# Altium PCB bridge.PcbDoc
Units mil, origin at the board's own origin, x right, y up, seen from the top; angles counter-clockwise.
Board outline 1693.9 x 1970 mil, 4 copper layers (Top Layer, Internal Plane 1, Internal Plane 2, Bottom Layer), stack 29.834 mil thick; 35 components, 64 nets, 87 pads, 388 vias.
Unrouted connection lines stored in the file: 2.
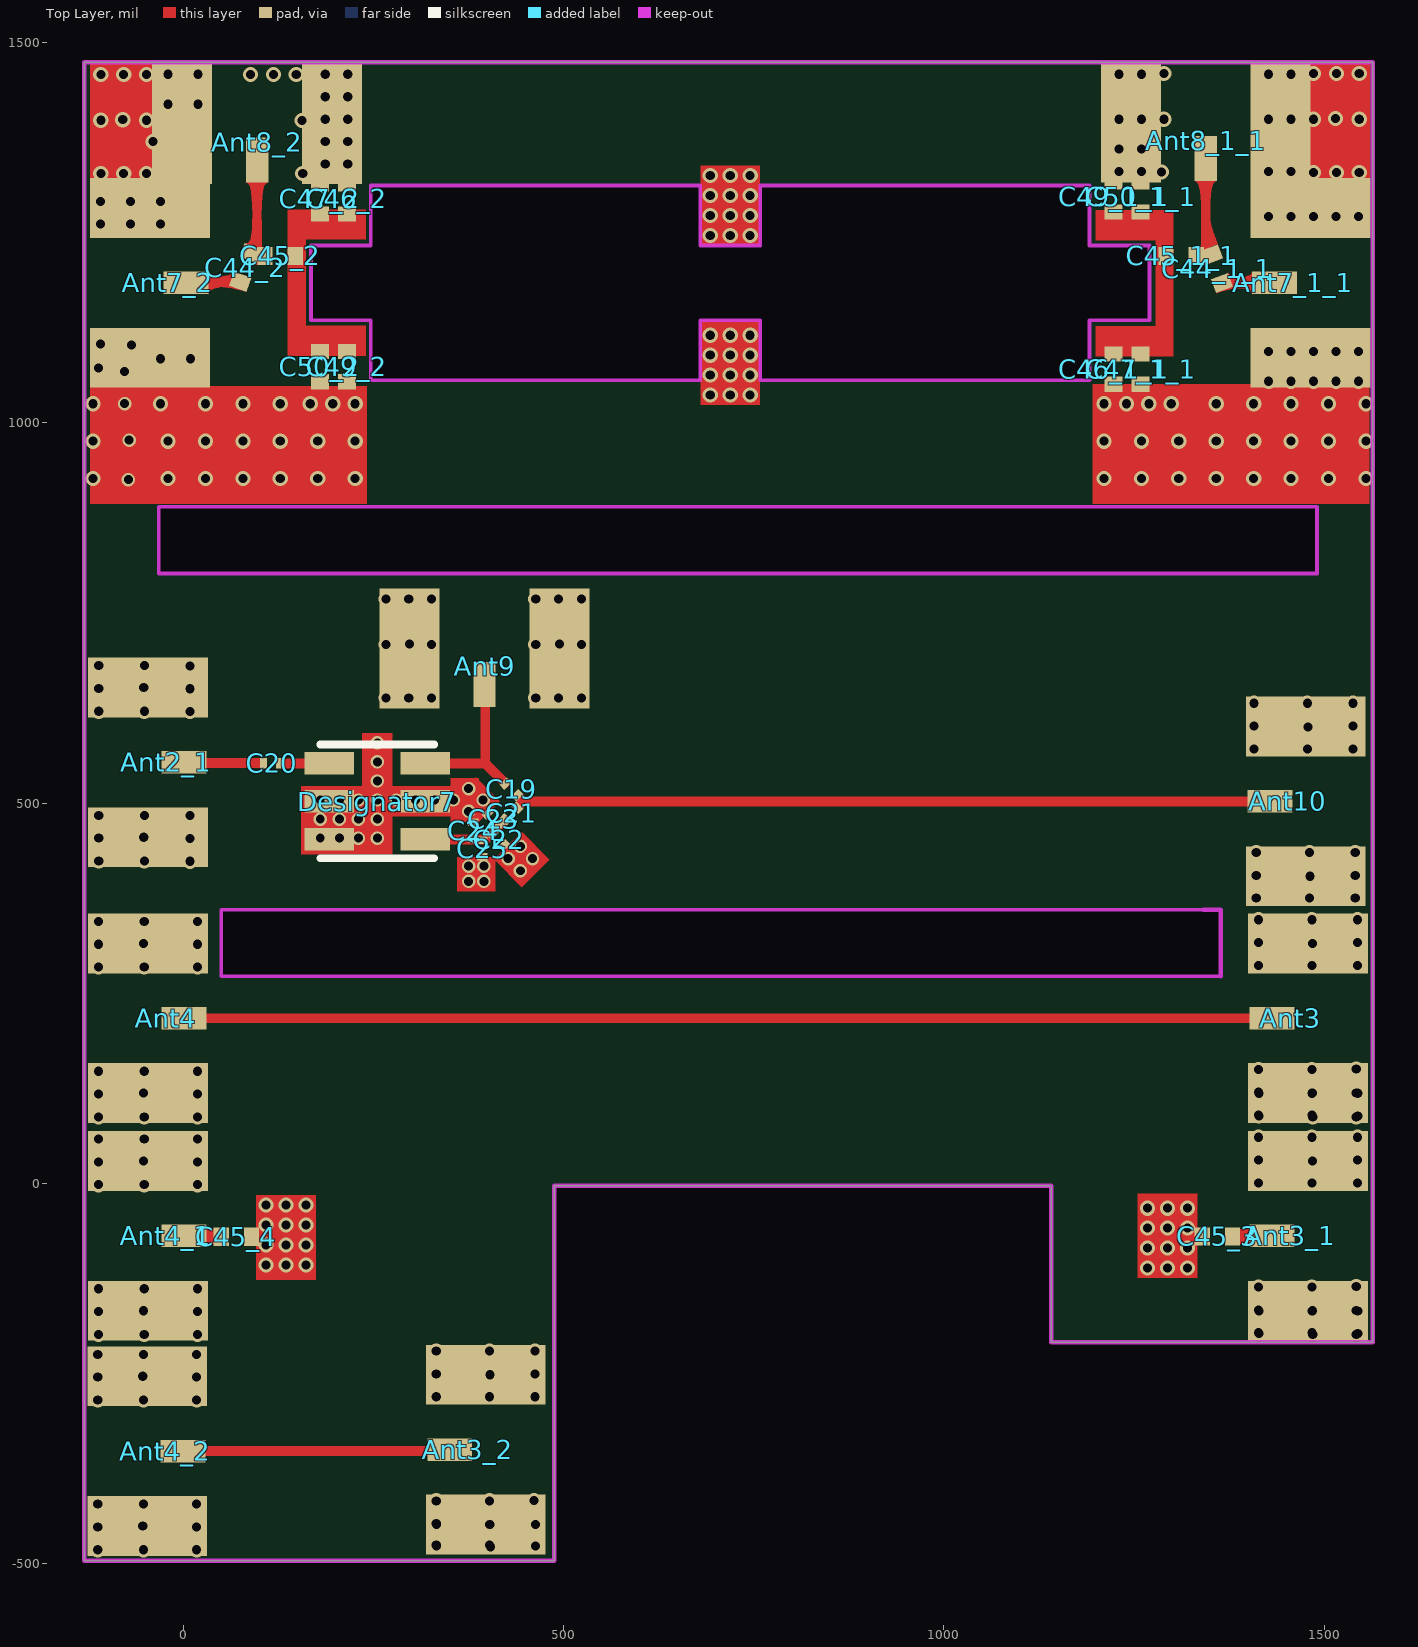
[diagram p0: Top Layer view]
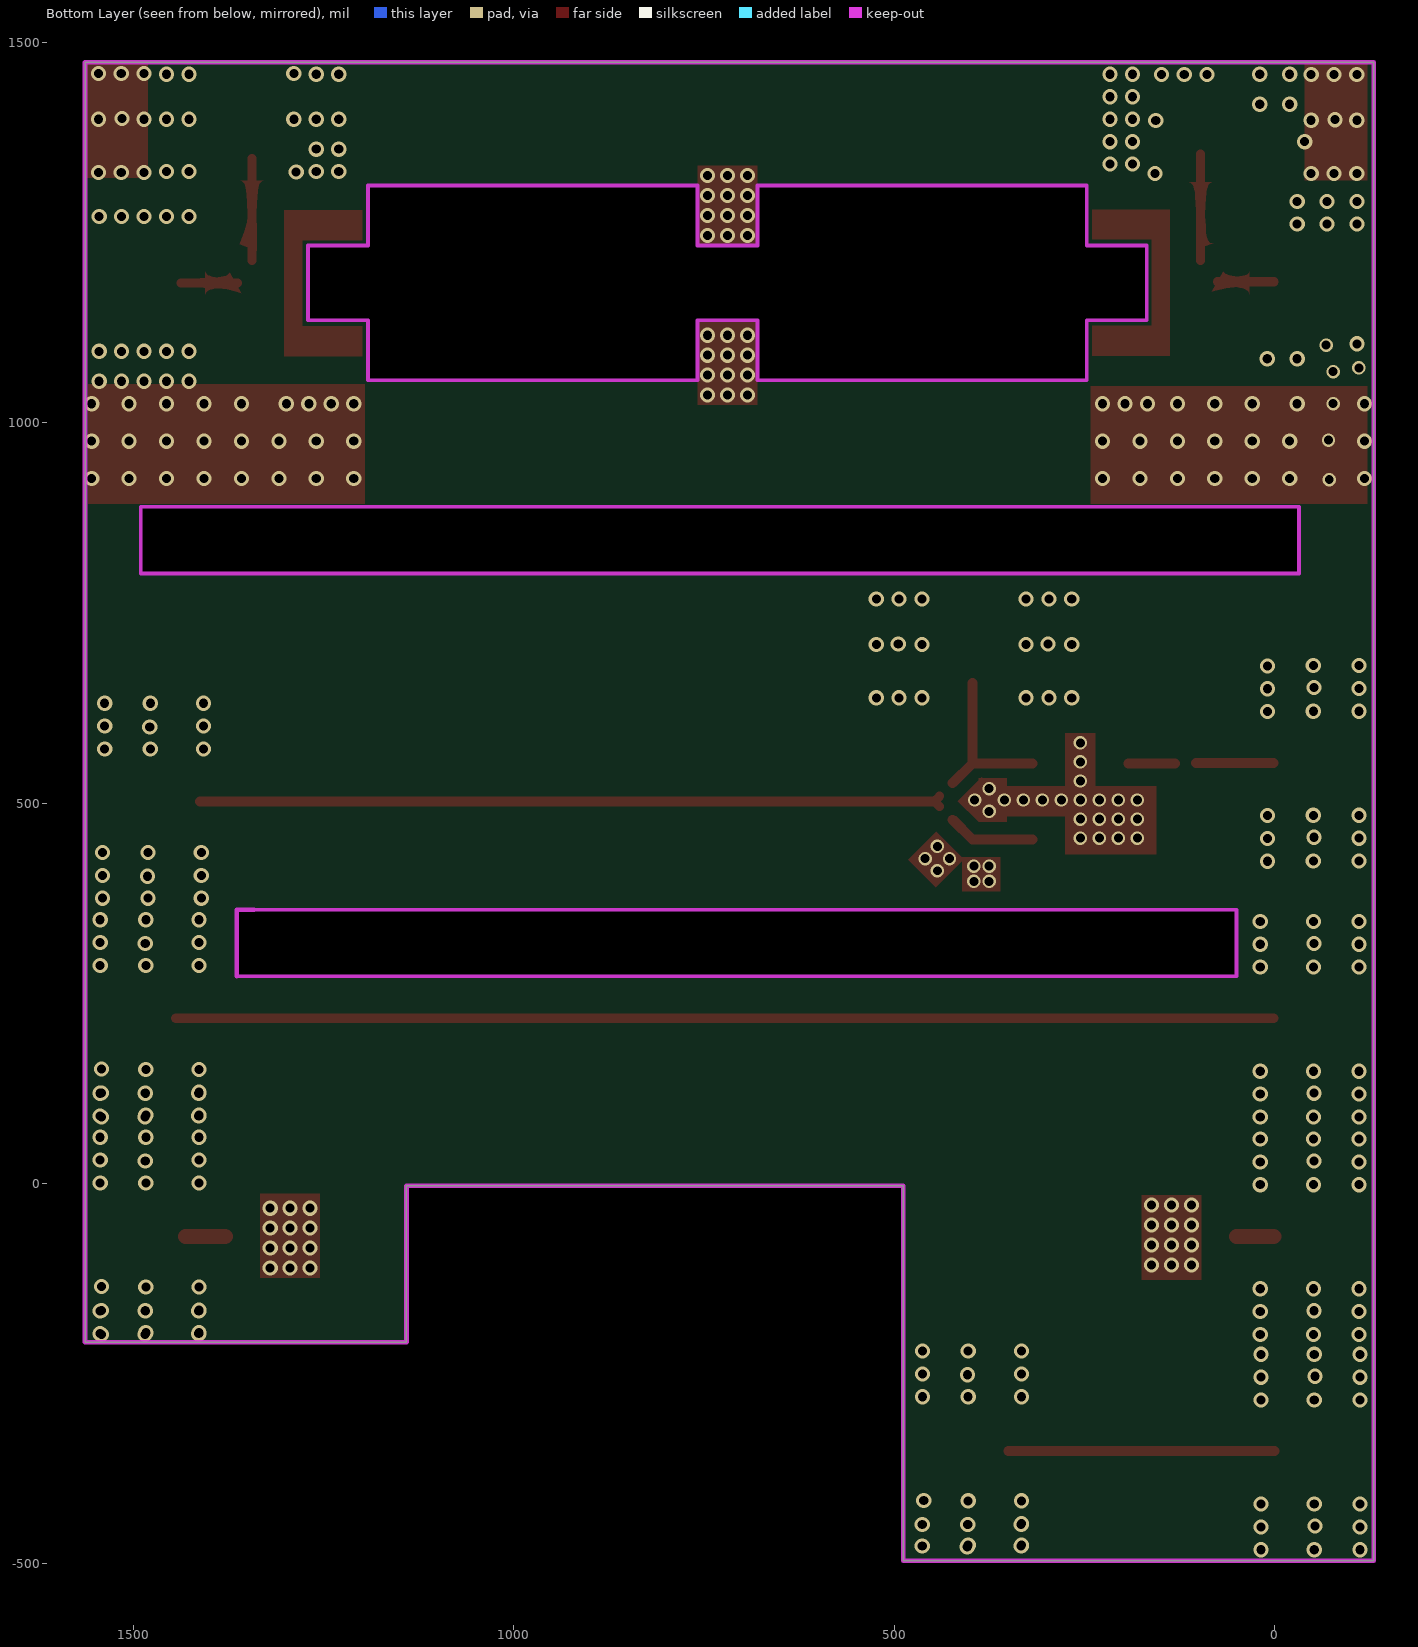
[diagram p1: Bottom Layer view, seen from below]
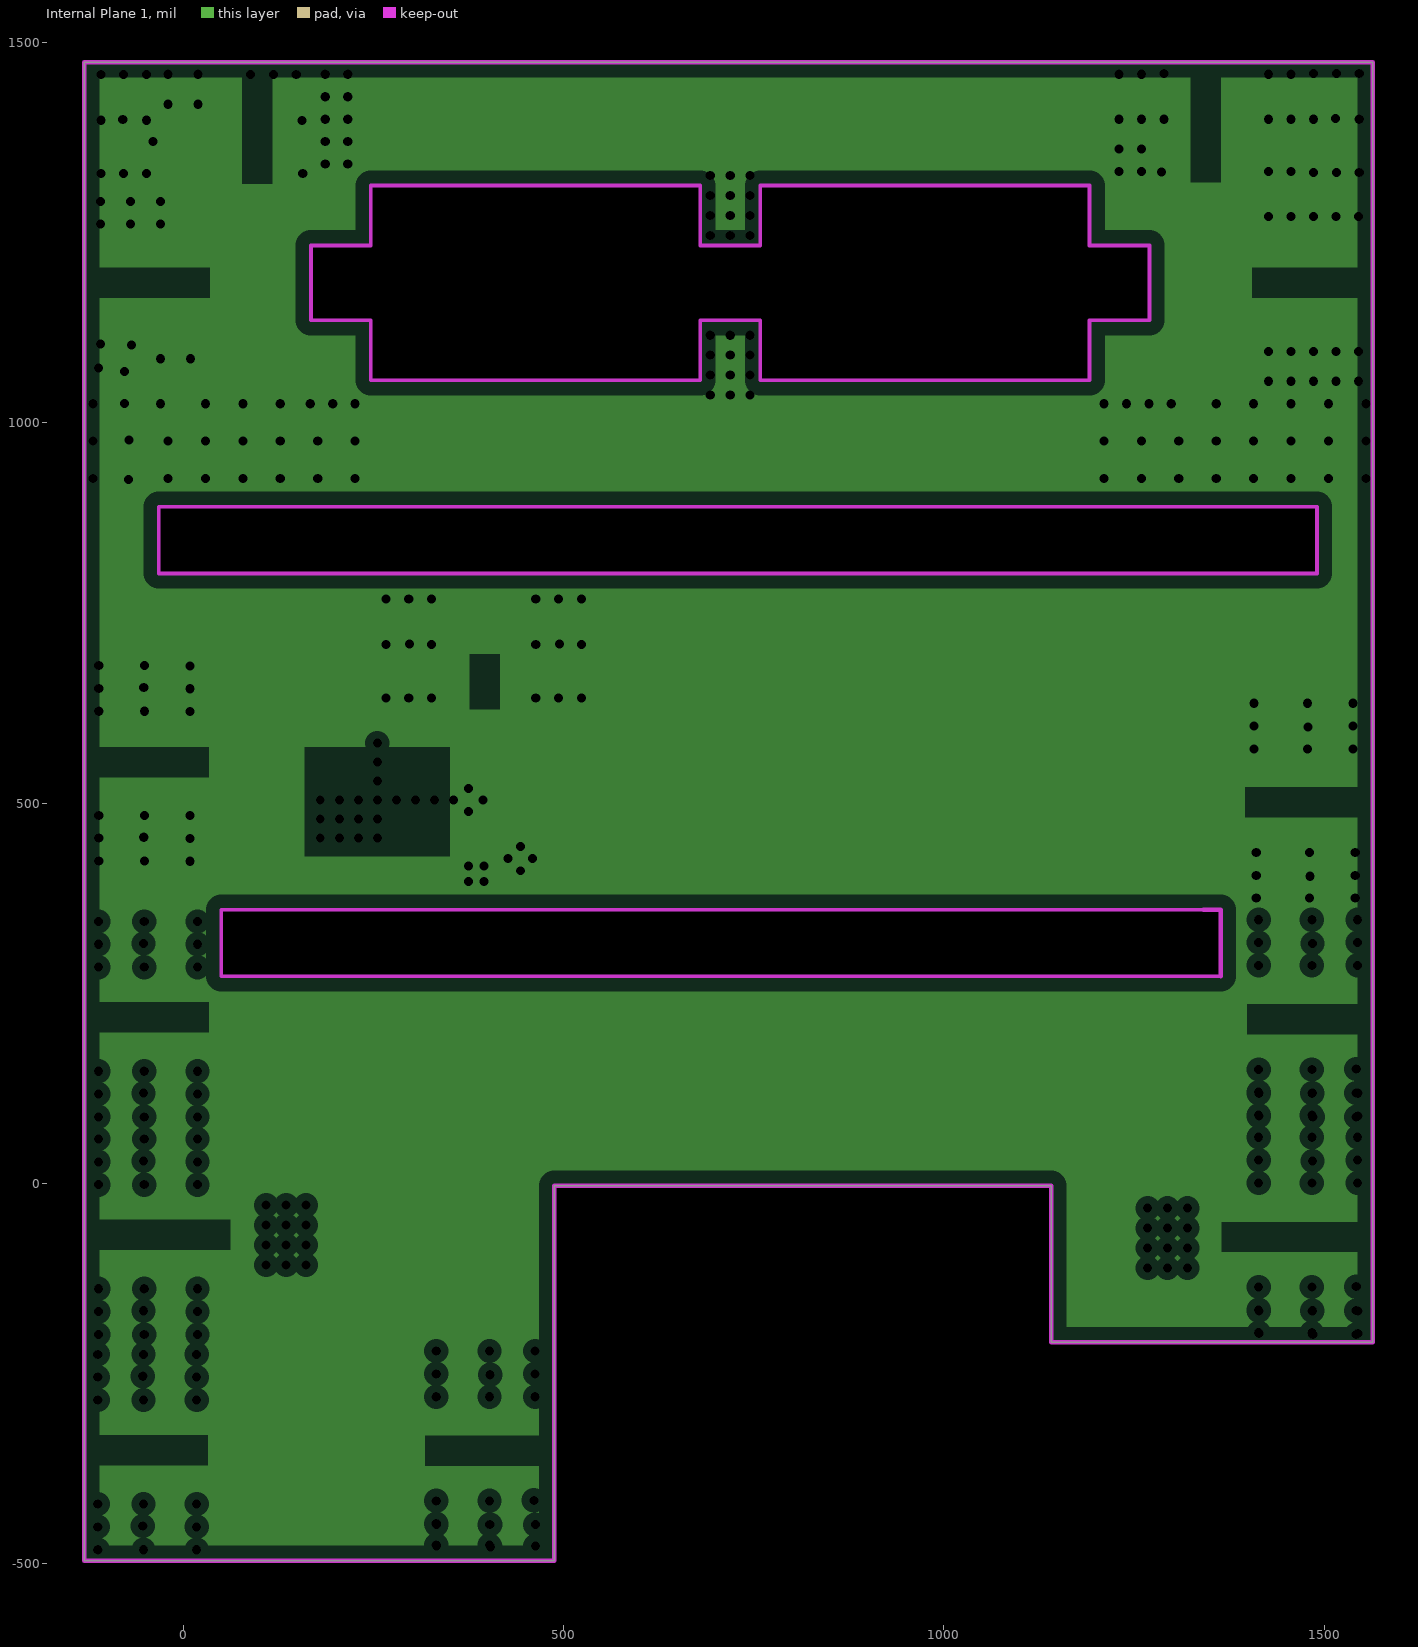
[diagram p2: Internal Plane 1, clearances drawn from the general rule]
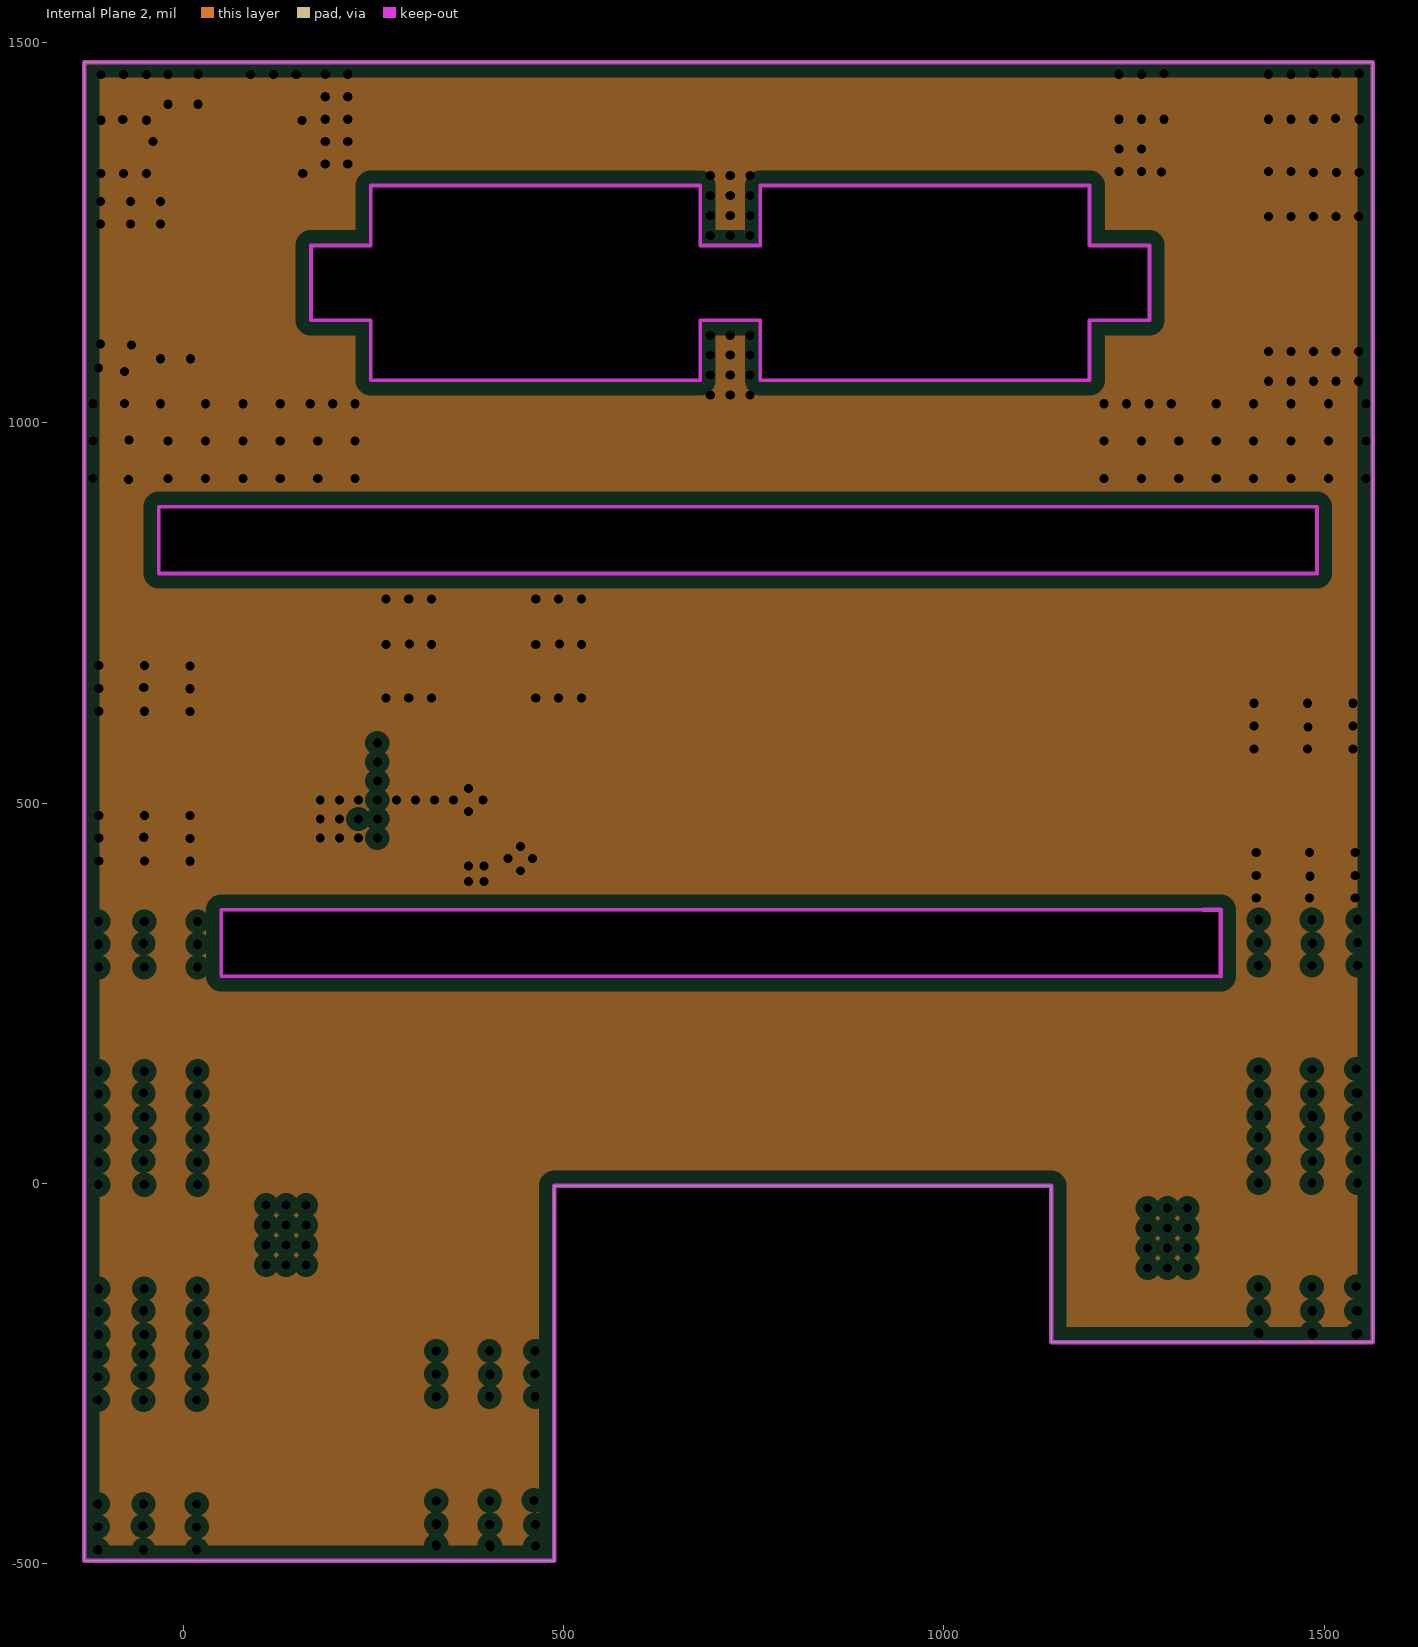
[diagram p3: Internal Plane 2, clearances drawn from the general rule]

## Layer stack, top to bottom
Top Solder: solder mask 0.4, Solder Resist, Dk 3.8
Top Layer: signal copper 1.4
Dielectric 1: prepreg 7.1, Dk 4.6
Internal Plane 1: plane copper 1.417, net GND
Dielectric 3: core 10, Dk 4.6
Internal Plane 2: plane copper 1.417, net GND
Dielectric 4: prepreg 7.1, Dk 4.6
Bottom Layer: signal copper 1.4
Bottom Solder: solder mask 0.4, Solder Resist, Dk 3.8

## Board outline
-130.28,-496 -130.28,1474 1563.62,1474 1563.62,-209 1141,-209 1141,-3 488,-3 488,-496
cut-out: 50,272.2 1364,272.2 1364,359.8 50,359.8
cut-out: -32.2,801.85 1490.43,801.85 1490.43,889.45 -32.2,889.45
cut-out: 1270.32,1134.53 1191.57,1134.53 1191.57,1055.79 758.5,1055.79 758.5,1134.53 679.76,1134.53 679.76,1055.79 246.69,1055.79 246.69,1134.53 167.95,1134.53 167.95,1232.95 246.69,1232.95 246.69,1311.69 679.76,1311.69 679.76,1232.95 758.5,1232.95 758.5,1311.69 1191.57,1311.69 1191.57,1232.95 1270.32,1232.95

## Design rules (kind name [scope] priority, off if disabled: settings)
Clearance [All] p1: gap=6 ignorepadtopadclearanceinfootprint=FALSE except(0: Arc-Hole Track-Hole SMDPad-Hole THPad-Hole Via-Hole Fill-Hole Poly-Hole Region-Hole Text-Hole)
DiffPairsRouting [All] p1: maxlimit=10 minlimit=10 mostfreqgap=10 toplayer_minwidth=5.98 toplayer_maxwidth=15 toplayer_prefwidth=15 bottomlayer_minwidth=5.98 bottomlayer_maxwidth=15 bottomlayer_prefwidth=15 maxuncoupledlength=500
MinimumSolderMaskSliver [All] p1 off: minsoldermaskwidth=10
PlaneClearance [All] p1: clearance=10
PlaneConnect [All] p1: planeconnectstyle=Direct reliefexpansion=20 reliefentries=4 reliefconductorwidth=10 reliefairgap=10
PolygonConnect [All] p1: connectstyle=Direct reliefconductorwidth=10 reliefentries=4 polygonreliefangle="90 Angle" airgapwidth=10
RoomDefinition mixer [InComponentClass('mixer')] p1 off: confinementstyle=ConfineIn formatcopy=TRUE lockcomponents=FALSE outline 1838.72,1218.73 7307.72,1218.73 7307.72,1613.73 1838.72,1613.73
RoomDefinition power [InComponentClass('power')] p2 off: confinementstyle=ConfineIn formatcopy=TRUE lockcomponents=FALSE outline 1834.72,-428.27 4179.72,-428.27 4179.72,-188.27 1834.72,-188.27
RoutingVias [All] p1: holewidth=12 width=20 viastyle="Through Hole" minholewidth=11.81 minwidth=19.68 maxholewidth=28 maxwidth=50
SilkToBoardRegionClearance [All] p1 off:
SilkToSilkClearance [All] p1 off: silktosilkclearance=10
SilkToSolderMaskClearance [IsPad] p1 off: minsilkscreentomaskgap=10 clearancetoexposedcopper=TRUE
SolderMaskExpansion [All] p1: expansion=4
Width [All] p1: maxlimit=60 minlimit=6 preferedwidth=6
23 further rules are at their usual default settings.

## Classes and differential pairs
component class mixer: R28
differential pair IF2: +IF2_P -IF2_N
differential pair IF1: +IF1_P -IF1_N

## Components (designator, comment, footprint, x,y, rotation, side; value= is the part's Value field where it differs from the comment)
Ant2_1 "Antenna" SMA-2 -46.06,651.79 r270 top (schematic designator Ant2)
Ant3 "Antenna" SMA-2 1478.66,118.58 r90 top (schematic designator Ant2)
Ant3_1 "Antenna" SMA-2 1478.66,-167.42 r90 top (schematic designator Ant2)
Ant3_2 "Antenna" SMA-2 397.66,-448.42 r90 top (schematic designator Ant2)
Ant4 "Antenna" SMA-2 -46.24,315.43 r270 top (schematic designator Ant2)
Ant4_1 "Antenna" SMA-2 -46.24,29.43 r270 top (schematic designator Ant2)
Ant4_2 "Antenna" SMA-2 -47.24,-253.57 r270 top (schematic designator Ant2)
Ant7_1_1 "Antenna" SMA-2 1481.93,1085.32 r90 top (schematic designator Ant2)
Ant7_2 "Antenna" SMA-2 -43.66,1282.17 r270 top (schematic designator Ant2)
Ant8_1_1 "Antenna" SMA-2 1442.56,1394.37 r180 top (schematic designator Ant2)
Ant8_2 "Antenna" SMA-2 195.51,1392.4 r180 top (schematic designator Ant2)
Ant9 "Antenna" SMA-2 494.55,703.26 r180 top (schematic designator Ant2)
Ant10 "Antenna" SMA-2 1475.67,403.76 r90 top (schematic designator Ant2)
C19 "0.1uF" 0201 431.38,517.93 r135 top
C20 "0.1uF" 0201 116.42,552.38 r180 top (schematic designator C19)
C21 "0.1uF" 0201 431.38,486.43 r45 top (schematic designator C19)
C22 "0.1uF" 0201 414.65,451.98 r315 top (schematic designator C19)
C23 "0.1uF" 0201 407.76,478.56 r315 top (schematic designator C19)
C24 "0.1uF" 0201 381.18,463.8 r270 top (schematic designator C19)
C25 "0.1uF" 0201 392.99,440.17 r270 top (schematic designator C19)
C44_1_1 "1nF" 0402 1358.9,1202.44 r290 top (schematic designator C43)
C44_2 "1nF" 0402 81.69,1203.74 r70 top (schematic designator C43)
C45_1_1 "1nF" 0402 1311.65,1219.17 r0 top (schematic designator C43)
C45_2 "1nF" 0402 127.6,1219.17 r180 top (schematic designator C43)
C45_3 "1nF" 0402 1359.6,-69.83 r180 top (schematic designator C43)
C45_4 "1nF" 0402 69.68,-70 r0 top (schematic designator C43)
C46_1_1 "1nF" 0402 1223.07,1070.55 r270 top (schematic designator C43)
C46_2 "1nF" 0402 215.2,1293.98 r90 top (schematic designator C43)
C47_1_1 "1nF" 0402 1258.5,1070.55 r270 top (schematic designator C43)
C47_2 "1nF" 0402 179.76,1293.98 r90 top (schematic designator C43)
C49_1_1 "1nF" 0402 1223.07,1296.98 r270 top (schematic designator C43)
C49_2 "1nF" 0402 215.2,1073.5 r90 top (schematic designator C43)
C50_1_1 "1nF" 0402 1258.5,1296.98 r270 top (schematic designator C43)
C50_2 "1nF" 0402 179.76,1073.5 r90 top (schematic designator C43)
Designator7 "Comment" TCM1-63AX+ 255.2,502.18 r270 top

## Footprints (in the part's own frame and the unit in brackets; to place one, negate y for a bottom-side part, rotate by r counter-clockwise, add the part's x,y. Pads: shape width x height; smd on the part's side, far side on the other; paste and mask are expansions set on the pad)
0201 [mm]
  rect 0.25x0.35 smd: 1(-0.275,0) 2(0.275,0)
0402 [mil] "0402-RES"
  rect 20x24 smd: 1(-19.68,0) 2(20,0)
SMA-2 [mm]
  rect 0.75x1.5 smd: 1(2.5,1.2)
  rect 2x4 smd: GND(0,0) GND(5,0)
  Top Layer pour cut-out: 1,2 4,2 4,-2 1,-2
TCM1-63AX+ [mm]
  rect 0.75x1.65 smd: 1(-1.27,1.6) 2(0,1.6) 2(0,-1.6) 2(1.27,-1.6) 3(1.27,1.6) 5(-1.27,-1.6)
  Top Layer region: -0.508,0.254 0.508,0.254 0.508,2.54 -0.508,2.54
  Top Layer region: -2.286,-0.508 1.778,-0.508 1.778,0.508 -2.286,0.508
  Top Layer region: -0.508,-2.54 1.778,-2.54 1.778,-0.254 -0.508,-0.254
  silkscreen extent -1.9,-1.9 1.9,1.9

## Part data
C19 C20 C21 C22 C23 C24 C25: library part CAP0402-CAP, "<b>Capacitor</b> / Standard 0603 ceramic capacitor, and 0.1\" leaded capacitor.", PARTNO=CC0402ZRY5V7BB104
C44_1_1 C44_2 C45_1_1 C45_2 C45_3 C45_4 C46_1_1 C46_2 C47_1_1 C47_2 C49_1_1 C49_2 C50_1_1 C50_2: library part CAP0402-CAP, "<b>Capacitor</b> / Standard 0603 ceramic capacitor, and 0.1\" leaded capacitor."

## Via types
v1: diameter 20, hole 12, Top Layer to Bottom Layer, tented both sides, 352 vias
v2: diameter 17.72, hole 11.81, Top Layer to Bottom Layer, 36 vias

## Nets (pads, with @x,y where several pads share a name; then routed paths per layer and width w, separated by ;. In a path a pad name is that pad's centre, name@x,y a point inside that pad or via, vN(x,y) a via of type N, cw(c..) or ccw(c..) an arc to the next point about the centre after c; other vN are vias at no path point)
5V: 
5V-MIXER: Ant7_1_1.1 C44_1_1.2 | length 74.3
  Top Layer w12: C44_1_1.2@1363.31,1183.74 Ant7_1_1.1@1437.64,1183.74
5VA: 
5VB: 
6V: 
-3.3V: 
DETO: Ant8_1_1.1 C44_1_1.1 C44_2.2 C45_1_1.2 C45_2.2 | length 273.6
  Top Layer w12: C44_2.2@97.09,1213.27 97.09,1353.03 ; C44_1_1.1@1344.13,1213.27 Ant8_1_1.1
GND: Ant2_1.GND Ant7_1_1.GND Ant7_2.GND Ant8_1_1.GND Ant8_2.1 Ant8_2.GND Ant9.GND Ant10.GND C22.2 C23.1 C46_1_1.2 C46_2.2 C47_1_1.2 C47_2.2 C49_1_1.1 C49_2.1 C50_1_1.1 C50_2.1 Designator7.2
  other v1: 1410.67,374.9 1480.67,374.9 1540.67,374.9 1481.5,403.76 1410.67,404.9 1540.67,404.9 -111.06,423.8 -51.06,423.8 9.13,423.44 1410.67,434.9 1480.67,434.9 1540.67,434.9 -111.06,453.8 9.13,453.44 -51.89,454.94 -111.06,483.8 -51.06,483.8 9.13,483.44 1407.76,571.12 1477.76,571.12 1537.76,571.12 1478.58,599.98 1407.76,601.12 1537.76,601.12 -111.06,620.65 -51.06,620.65 9.13,620.29 1407.76,631.12 1477.76,631.12 1537.76,631.12 266.56,638.26 296.56,638.26 326.56,638.26 463.41,638.26 493.41,638.26 523.41,638.26 -111.06,650.65 9.13,650.29 -51.89,651.79 -111.06,680.65 -51.06,680.65 9.13,680.29 266.56,708.26 297.7,709.09 326.56,708.26 463.41,708.26 494.55,709.09 523.41,708.26 266.56,768.26 296.56,768.26 326.56,768.26 463.41,768.26 493.41,768.26 523.41,768.26 -118.39,926.46 -19.96,926.46 29.25,926.46 78.46,926.46 127.68,926.46 176.89,926.46 226.1,926.46 1210.35,926.46 1259.57,926.46 1308.78,926.46 1357.99,926.46 1407.2,926.46 1456.42,926.46 1505.63,926.46 1554.84,926.46 -118.39,975.67 -19.96,975.67 29.25,975.67 78.46,975.67 127.68,975.67 176.89,975.67 226.1,975.67 1210.35,975.67 1259.57,975.67 1308.78,975.67 1357.99,975.67 1407.2,975.67 1456.42,975.67 1505.63,975.67 1554.84,975.67 -118.39,1024.88 -29.8,1024.88 29.25,1024.88 78.46,1024.88 127.68,1024.88 167.05,1024.88 196.57,1024.88 226.1,1024.88 1210.35,1024.88 1239.88,1024.88 1269.41,1024.88 1298.94,1024.88 1357.99,1024.88 1407.2,1024.88 1456.42,1024.88 1505.63,1024.88 1554.84,1024.88 692.87,1036.3 719.09,1036.3 745.32,1036.3 1426.89,1054.41 1456.42,1054.41 1485.94,1054.41 1515.47,1054.41 1545,1054.41 692.87,1062.52 719.09,1062.52 745.32,1062.52 -29.8,1083.94 9.57,1083.94 692.87,1088.74 719.09,1088.74 745.32,1088.74 1426.89,1093.78 1456.42,1093.78 1485.94,1093.78 1515.47,1093.78 1545,1093.78 -108.54,1103.62 692.87,1114.96 719.09,1114.96 745.32,1114.96 692.87,1246.06 719.09,1246.06 745.32,1246.06 -108.54,1261.1 -69.17,1261.1 -29.8,1261.1 1426.89,1270.95 1456.42,1270.95 1485.94,1270.95 1515.47,1270.95 1545,1270.95 692.87,1272.28 719.09,1272.28 745.32,1272.28 -108.54,1290.63 -69.17,1290.63 -29.8,1290.63 692.87,1298.5 719.09,1298.5 745.32,1298.5 692.87,1324.72 719.09,1324.72 745.32,1324.72 -108.23,1327.48 -78.23,1327.48 -48.23,1327.48 157.13,1327.44 1485.94,1328.9 1515.94,1328.9 1545.94,1328.9 1230.04,1330 1259.57,1330 1286.06,1329.41 1426.89,1330 1456.42,1330 186.73,1339.84 216.26,1339.84 1230.04,1359.53 1259.57,1359.53 -39.65,1369.37 186.73,1369.37 216.26,1369.37 -108.23,1397.48 -48.23,1397.48 156.14,1397.32 -79.37,1398.31 186.73,1398.9 216.26,1398.9 1230.04,1398.9 1259.57,1398.9 1289.09,1398.9 1426.89,1398.9 1456.42,1398.9 1485.94,1398.9 1545.94,1398.9 1514.8,1399.72 -19.96,1418.58 19.41,1418.58 186.73,1428.43 216.26,1428.43 -108.23,1457.48 -78.23,1457.48 -48.23,1457.48 -19.96,1457.95 19.41,1457.95 88.62,1457.48 118.62,1457.48 148.62,1457.48 186.73,1457.95 216.26,1457.95 1230.04,1457.95 1259.57,1457.95 1426.89,1457.95 1456.42,1457.95 1289.09,1458.9 1485.94,1458.9 1515.94,1458.9 1545.94,1458.9
  other v2: 375.2,396.95 395.2,396.95 443.2,410.95 375.2,416.95 395.2,416.95 427.2,426.95 459.2,426.95 443.2,442.95 180.2,453.95 205.2,453.95 230.2,453.95 180.2,478.95 205.2,478.95 375.2,488.95 180.2,503.95 205.2,503.95 230.2,503.95 280.2,503.95 305.2,503.95 330.2,503.95 355.2,503.95 394.2,503.95 375.2,518.95 -72,925 -71,977 -77,1025 -77,1067 -111,1072 -68,1102
IF1_N: 
IF1_P: 
IF2_N: 
IF2_P: 
IF3+: 
IF3-: 
NetAnt1_1: 
NetAnt2_1: 
NetC1_1: 
NetC1_2: 
NetC2_1: 
NetC4_1: 
NetC7_2: 
NetC11_2: 
NetC15_2: 
NetC18_2: 
NetC24_2: 
NetC28_1: 
NetC28_2: 
NetC29_1: 
NetC30_1: 
NetC30_2: 
NetC31_1: 
NetC31_2: 
NetC43_2: 
NetC44_1: 
NetC44_2: 
NetC45_2: 
NetC46_1: 
NetC46_2: 
NetC47_2: 
NetC48_2: 
NetC49_1: 
NetC49_2: 
NetC50_1: 
NetC50_2: 
NetC51_2: 
NetC53_2: 
NetC57_1: 
NetC57_2: 
NetC58_1: 
NetC58_2: 
NetC59_1: 
NetC59_2: 
NetC60_1: 
NetC60_2: 
NetC64_2: 
NetC66_2: 
NetR2_1: 
NetR4_1: 
NetR5_1: 
NetR10_1: 
NetR15_1: 
NetR24_1: 
VSET: 
VSYS: 
pads on no net: Ant2_1.1 Ant3.1 Ant3.GND Ant3_1.1 Ant3_1.GND Ant3_2.1 Ant3_2.GND Ant4.1 Ant4.GND Ant4_1.1 Ant4_1.GND Ant4_2.1 Ant4_2.GND Ant7_2.1 Ant9.1 Ant10.1 C19.1 C19.2 C20.1 C20.2 C21.1 C21.2 C22.1 C23.2 C24.1 C24.2 C25.1 C25.2 C44_2.1 C45_1_1.1 C45_2.1 C45_3.1 C45_3.2 C45_4.1 C45_4.2 C46_1_1.1 C46_2.1 C47_1_1.1 C47_2.1 C49_1_1.2 C49_2.2 C50_1_1.2 C50_2.2 Designator7.1 Designator7.3 Designator7.5
copper on no net: | length 3453.7
  Top Layer w12: 0.63,1185.24 74.96,1185.24 ; 440.24,495.29 447.13,502.18 440.24,509.07
  Top Layer w13: 0,-352 350,-352 ; 1,217 1444,217 ; 1.18,552.38 103,552.38 ; 130.71,552.18 192.2,552.18 ; 318.19,452.18 397.13,452.18 423.01,478.07 ; 318.19,552.18 397.13,552.18 ; 397.13,658 397.13,552.18 ; 423.01,526.3 397.13,552.18 ; 447.13,502.18 1412.68,502.18
  Top Layer w20: 1,-70 50,-70 ; 1379.28,-69.83 1431.42,-69.83
  other v1: -112.24,-481.57 -52.24,-481.57 17.76,-481.57 403.84,-477.72 333.02,-476.58 463.02,-476.58 332.66,-475.28 402.66,-475.28 -112.24,-451.57 17.76,-451.57 -53.07,-450.43 333.02,-448.58 403.02,-448.58 403.49,-448.42 463.02,-448.58 332.66,-447.28 -112.24,-421.57 -52.24,-421.57 17.76,-421.57 332.66,-417.28 402.66,-417.28 461.01,-416.73 -112.24,-284.72 -52.24,-284.72 17.76,-284.72 332.66,-280.43 402.66,-280.43 462.66,-280.43 -112.24,-254.72 17.76,-254.72 -53.07,-253.57 403.49,-251.57 332.66,-250.43 462.66,-250.43 -112.24,-224.72 -52.24,-224.72 17.76,-224.72 332.66,-220.43 402.66,-220.43 462.66,-220.43 -111.24,-198.57 -51.24,-198.57 18.76,-198.57 1484.84,-198.72 1542.01,-198.72 1414.02,-197.58 1544.02,-197.58 1413.66,-196.28 1483.66,-196.28 -111.24,-168.57 18.76,-168.57 -52.07,-167.43 1414.02,-167.58 1484.02,-167.58 1484.49,-167.42 1542.01,-167.23 1544.02,-167.58 1413.66,-166.28 -111.24,-138.57 -51.24,-138.57 18.76,-138.57 1413.66,-136.28 1483.66,-136.28 1542.01,-135.73 1267.78,-111.22 1294,-111.22 1320.22,-111.22 109.06,-107.27 135.28,-107.27 161.5,-107.27 1267.78,-85 1294,-85 1320.22,-85 109.06,-81.05 135.28,-81.05 161.5,-81.05 1267.78,-58.78 1294,-58.78 1320.22,-58.78 109.06,-54.83 135.28,-54.83 161.5,-54.83 1267.78,-32.56 1294,-32.56 1320.22,-32.56 109.06,-28.61 135.28,-28.61 161.5,-28.61 -111.24,-1.72 -51.24,-1.72 18.76,-1.72 1413.66,0.57 1483.66,0.57 1543.66,0.57 -111.24,28.28 18.76,28.28 -52.07,29.43 1484.49,29.43 1413.66,30.57 1543.66,30.57 -111.24,58.28 -51.24,58.28 18.76,58.28 1413.66,60.57 1483.66,60.57 1543.66,60.57 -111.24,87.43 -51.24,87.43 18.76,87.43 1484.84,87.28 1542.01,87.28 1414.02,88.42 1544.02,88.42 1413.66,89.72 1483.66,89.72 -111.24,117.43 18.76,117.43 -52.07,118.57 1414.02,118.42 1484.02,118.42 1484.49,118.58 1542.01,118.77 1544.02,118.42 1413.66,119.72 -111.24,147.43 -51.24,147.43 18.76,147.43 1413.66,149.72 1483.66,149.72 1542.01,150.27 -111.24,284.28 -51.24,284.28 18.76,284.28 1413.66,286.57 1483.66,286.57 1543.66,286.57 -111.24,314.28 18.76,314.28 -52.07,315.43 1484.49,315.43 1413.66,316.57 1543.66,316.57 -111.24,344.28 -51.24,344.28 18.76,344.28 1413.66,346.57 1483.66,346.57 1543.66,346.57
  other v2: 255.2,453.95 230.2,478.95 255.2,478.95 255.2,503.95 255.2,528.95 255.2,553.95 255.2,578.95

## Polygon pours and split planes (outlines as drawn)
GND on Internal Plane 1 (split plane): 1543.53,1203.43 1405.31,1203.43 1405.31,1164.06 1543.53,1164.06 1543.53,520.41 1395.98,520.41 1395.98,481.04 1543.53,481.04 1543.53,235.23 1398.98,235.23 1398.98,195.86 1543.53,195.86 1543.53,-50.77 1365,-50.77 1365,-90.14 1543.53,-90.14 1543.53,-188.9 1161.1,-188.9 1161.1,-3 1160.71,0.92 1159.57,4.69 1157.71,8.17 1155.21,11.21 1152.17,13.71 1148.69,15.57 1144.92,16.71 1141,17.1 488,17.1 484.08,16.71 480.31,15.57 476.83,13.71 473.79,11.21 471.29,8.17 469.43,4.69 468.29,0.92 467.9,-3 467.9,-331.77 317.98,-331.77 317.98,-371.14 467.9,-371.14 467.9,-475.9 -110.18,-475.9 -110.18,-370.23 32.44,-370.23 32.44,-330.86 -110.18,-330.86 -110.18,-87.23 62,-87.23 62,-47.86 -110.18,-47.86 -110.18,198.77 33.44,198.77 33.44,238.14 -110.18,238.14 -110.18,534.15 33.62,534.15 33.62,573.52 -110.18,573.52 -110.18,1164.06 34.92,1164.06 34.92,1203.43 -110.18,1203.43 -110.18,1453.9 77.4,1453.9 77.4,1313.82 116.77,1313.82 116.77,1453.9 1324.45,1453.9 1324.45,1315.79 1363.82,1315.79 1363.82,1453.9 1543.53,1453.9
GND on Internal Plane 2 (split plane): 1543.53,-188.9 1161.1,-188.9 1161.1,-3 1160.71,0.92 1159.57,4.69 1157.71,8.17 1155.21,11.21 1152.17,13.71 1148.69,15.57 1144.92,16.71 1141,17.1 488,17.1 484.08,16.71 480.31,15.57 476.83,13.71 473.79,11.21 471.29,8.17 469.43,4.69 468.29,0.92 467.9,-3 467.9,-475.9 -110.18,-475.9 -110.18,1453.9 1543.53,1453.9

## Keep-outs
Keep-Out Layer:
  lines w5: 1338.2,359.8 50,359.8 50,272.2 1364,272.2 ; -32.2,801.85 -32.2,889.45 1490.43,889.45 1490.43,801.85 -32.2,801.85 ; 167.95,1134.53 167.95,1232.95 246.69,1232.95 246.69,1311.69 679.76,1311.69 679.76,1232.95 758.5,1232.95 758.5,1311.69 1191.57,1311.69 1191.57,1232.95 1270.32,1232.95 1270.32,1134.53 1191.57,1134.53 1191.57,1055.79 758.5,1055.79 758.5,1134.53 679.76,1134.53 679.76,1055.79 246.69,1055.79 246.69,1134.53 167.95,1134.53
  lines w6: 1341,359.8 1364,359.8 1364,272.2 ; -130.28,-496 488,-496 488,-483 488,-3 1141,-3 1141,-209 1316,-209 1563.62,-209 1563.62,93.19 1563.62,1474 -130.28,1474 -130.28,-496

## Other copper
Top Layer:
  region: 174.61,-15.5 95.87,-15.5 95.87,-126.83 174.61,-126.83
  rectangle: 1254.67,-124.33 1333.41,-12.99
  region net GND: 481.7,425.45 444.75,462.4 408.25,425.9 445.2,388.95
  region net GND: 410.71,383.95 410.71,429.35 360.2,429.35 360.2,383.95
  region net GND: 389.4,475.52 416.52,502.63 384.8,534.35 357.69,507.23
  rectangle net GND: 351.65,474.95 389.06,532.95
  rectangle net GND: 679.76,1023.19 758.5,1134.53
  rectangle net GND: 679.76,1232.95 758.5,1337.83
  region net GND: 241.77,1047.91 -122.4,1047.91 -122.4,893.39 241.77,893.39
  rectangle net GND: 1195.51,893.39 1559.69,1050.87
  rectangle net GND: 1480.95,1321.54 1560.67,1473.11
  rectangle net GND: -122.4,1318.58 -39.72,1472.13
  region: 1199.45,1126.65 1278.19,1126.65 1278.19,1239.84 1199.45,1239.84 1199.45,1279.21 1301.81,1279.21 1301.81,1087.28 1199.45,1087.28
  region: 239.8,1240.83 161.06,1240.83 161.06,1127.64 239.8,1127.64 239.8,1088.27 137.44,1088.27 137.44,1280.2 239.8,1280.2
Internal Plane 1 (plane layer: these items are gaps in the copper):
  rectangle: 1395.98,481.04 1555.98,520.41
  rectangle: 1398.98,195.86 1558.98,235.23
  rectangle: 1365,-90.14 1558.98,-50.77
  rectangle: 317.98,-371.14 477.98,-331.77
  region: 32.44,-330.86 -127.56,-330.86 -127.56,-370.23 32.44,-370.23
  region: 62,-47.86 -126.56,-47.86 -126.56,-87.23 62,-87.23
  region: 33.44,238.14 -126.56,238.14 -126.56,198.77 33.44,198.77
  region: 350.67,573.52 159.72,573.52 159.72,430.33 350.67,430.33
  region: 416.28,623.57 416.28,695.39 376.91,695.39 376.91,623.57
  region: 33.62,573.52 -126.38,573.52 -126.38,534.15 33.62,534.15
  rectangle: 1405.31,1164.06 1565.31,1203.43
  region: 1363.82,1315.79 1363.82,1475.79 1324.45,1475.79 1324.45,1315.79
  region: 116.77,1313.82 116.77,1473.82 77.4,1473.82 77.4,1313.82
  region: 34.92,1203.43 -125.08,1203.43 -125.08,1164.06 34.92,1164.06

## Silkscreen, mask and mechanical layers (free items; w line width, h text height)
Top Solder:
  rectangle: 1195,878 1568,1075
  rectangle: -135,875 243,1053
  region: 1569.17,-499 1569.17,895 -133.41,895 -133.41,-499
  region: 916.77,258.07 916.77,336.73 805.43,336.73 805.43,258.07
  rectangle: 679.76,1023.19 758.43,1134.53
  rectangle: 679.76,1232.95 758.5,1337.83
  region: 1195.51,1476.06 1565.59,1476.06 1565.59,996.73 1195.51,996.73 1195.51,1171 1309.69,1171 1309.69,1202.49 1195.51,1202.49
  region: 242.76,1006.58 -127.32,1006.58 -127.32,1473.11 242.76,1473.11 242.76,1199.49 128.58,1199.49 128.58,1167.99 242.76,1167.99